# EAGLE board TelemetryModule (EAGLE 9.5.2)
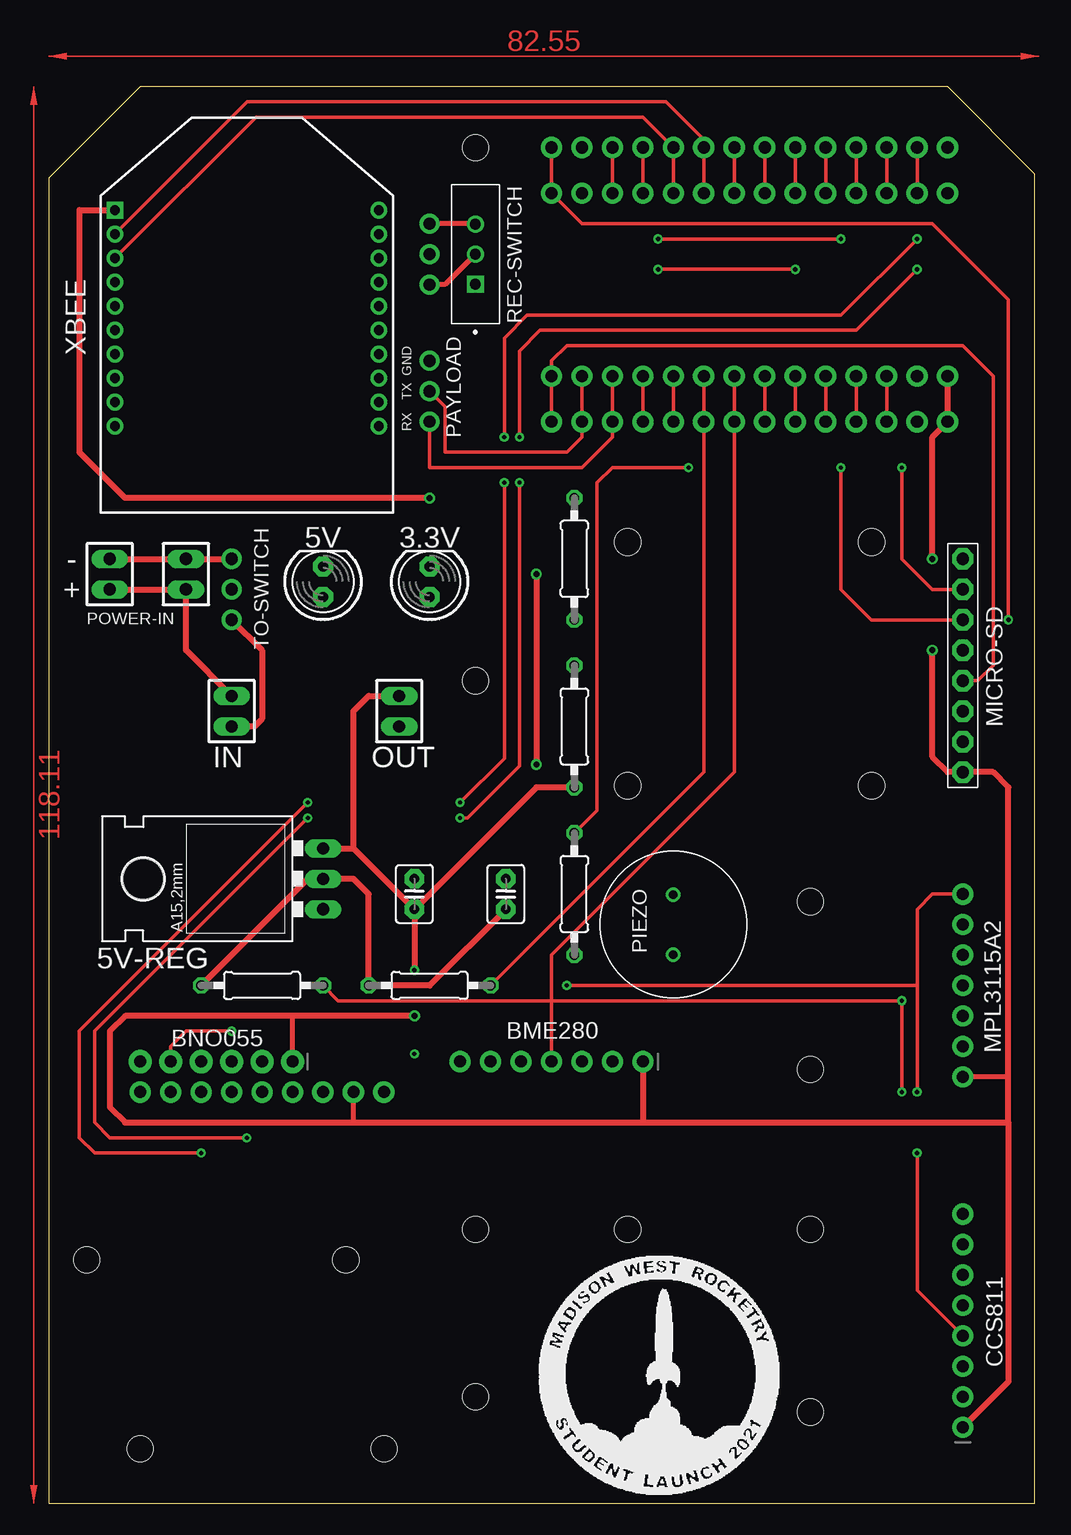
[diagram p0: board, top side]
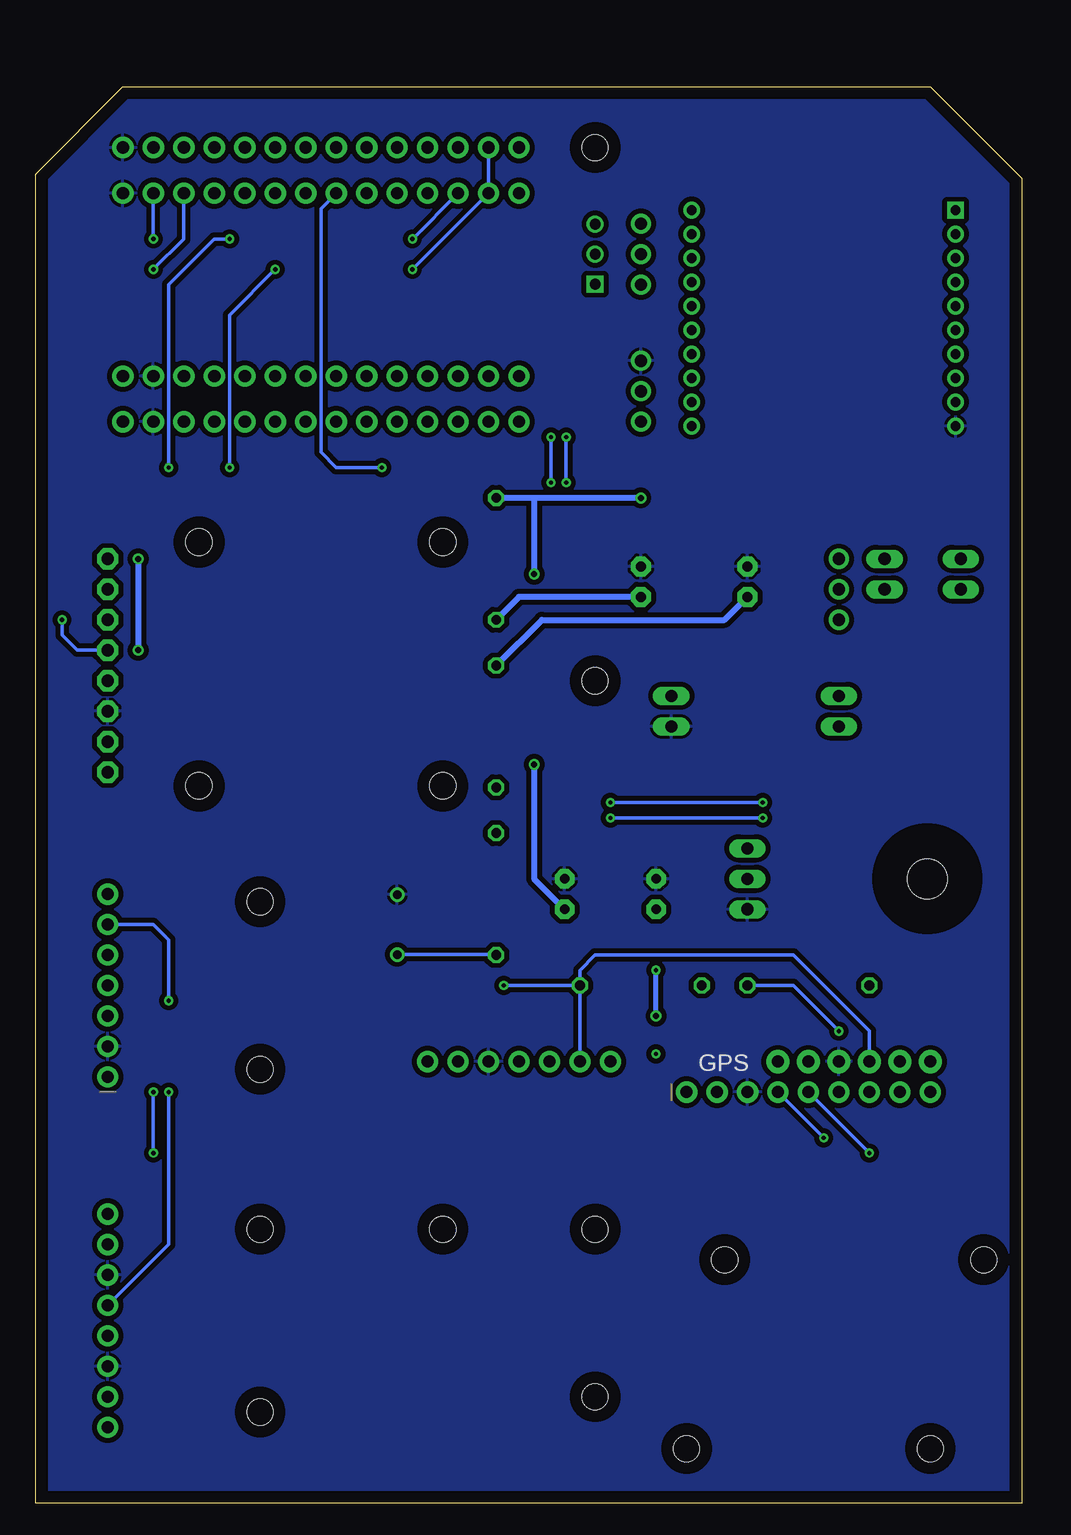
[diagram p1: board, bottom side, seen from below]

Size 82.22 x 118.1 mm. Coordinates in mm from the lower left corner, seen from the top.
Outline: 0,0 82.22,0 82.22,110.82 74.94,118.1 7.61,118.1 0,110.49 0,0
Copper layers (1*16): Top 0.035mm / dielectric 1.5mm / Bottom 0.035mm
Design rules "default": minimum track width 6mil, minimum drill 0.35mm, track to track 6mil, track to pad 6mil, pad to pad 6mil, via to via 6mil, smd to smd 6mil, copper to edge 40mil, drill to drill 6mil, minimum pad ring 10mil, minimum via ring 8mil, stop-mask expansion 4mil, vias tented up to drill 0mil, thermal gap 10mil
Holes 2.2 mm at 68.58,59.82 68.58,80.14 48.26,80.14 48.26,59.82
Holes 2.16 mm at 35.56,22.86 48.26,22.86 63.5,50.16 63.5,36.2 3.17,20.32 24.77,20.32 7.62,4.57 27.94,4.57 63.5,22.86 63.5,7.62 35.56,68.58 35.56,113.03 35.56,8.89

## Footprints (pad centres in the part's own frame; a part is rotated, then mirrored left to right if it is on the bottom)
LED5MM = drill 0.813 pad 1.676 octagon: A -1.27,0; K 1.27,0
LD1117V33 = drill 1.016 long: GND -2.54,-8.89; IN 2.54,-8.89; OUT 0,-8.89 | hole 3.302: 0,6.096
SIP-100-02-40Y = drill 1.016 long: 1 -1.27,0; 2 1.27,0
1X07_ROUND_70 = drill 1 pad 1.778: 1 -7.62,0; 2 -5.08,0; 3 -2.54,0; 4 0,0; 5 2.54,0; 6 5.08,0; 7 7.62,0
1X06_ROUND_76 = drill 1 pad 1.93: 1 -6.35,0; 2 -3.81,0; 3 -1.27,0; 4 1.27,0; 5 3.81,0; 6 6.35,0
C2.5-3 = drill 0.813 pad 1.6 octagon: 1 -1.27,0; 2 1.27,0
1X08_ROUND_70 = drill 1 pad 1.778: 1 -8.89,0; 2 -6.35,0; 3 -3.81,0; 4 -1.27,0; 5 1.27,0; 6 3.81,0; 7 6.35,0; 8 8.89,0
1X09_ROUND_70 = drill 1 pad 1.778: 1 -10.16,0; 2 -7.62,0; 3 -5.08,0; 4 -2.54,0; 5 0,0; 6 2.54,0; 7 5.08,0; 8 7.62,0; 9 10.16,0
1X08-BIG = drill 1.016 pad 1.778 octagon: 1 -8.89,0; 2 -6.35,0; 3 -3.81,0; 4 -1.27,0; 5 1.27,0; 6 3.81,0; 7 6.35,0; 8 8.89,0
1X03-CLEANBIG = drill 1.016 pad 1.676: 1 -2.54,0; 2 0,0; 3 2.54,0
0207/10 = drill 0.813 octagon: 1 -5.08,0; 2 5.08,0
SW_MINI-SPDT-SW = drill 0.9 square: 1 -2.5,0 | drill 0.9: 2 0,0; 3 2.5,0
1X14-CB = drill 1.016 pad 1.778: 1 -16.51,0; 2 -13.97,0; 3 -11.43,0; 4 -8.89,0; 5 -6.35,0; 6 -3.81,0; 7 -1.27,0; 8 1.27,0; 9 3.81,0; 10 6.35,0; 11 8.89,0; 12 11.43,0; 13 13.97,0; 14 16.51,0
PS1240P02BT = drill 0.7: P$1 -2.5,0; P$2 2.5,0
DIP2200W51P200L3294H279Q20P = drill 0.8 pad 1.4 square: 1 -11,8.75 | drill 0.8 pad 1.4: 2 -11,6.75; 3 -11,4.75; 4 -11,2.75; 5 -11,0.75; 6 -11,-1.25; 7 -11,-3.25; 8 -11,-5.25; 9 -11,-7.25; 10 -11,-9.25; 11 11,-9.25; 12 11,-7.25; 13 11,-5.25; 14 11,-3.25; 15 11,-1.25; 16 11,0.75; 17 11,2.75; 18 11,4.75; 19 11,6.75; 20 11,8.75

## Placement (x,y rotation side)
3.3V  [LED5MM]  31.75,76.83 90 top
5V  [LED5MM]  22.86,76.83 90 top
5V-REG  LD1117V33  [LD1117V33]  13.97,52.07 90 top
AUX-POWER-IN  M-1X02-SIP-100-40Y  [SIP-100-02-40Y]  11.43,77.47 90 top
BME280  [1X07_ROUND_70]  41.91,36.83 180 top
BNO055  [1X06_ROUND_76]  13.97,36.83 180 top
C1  10µF  [C2.5-3]  30.48,50.8 90 top
C2  10µF  [C2.5-3]  38.1,50.8 90 top
CCS811  [1X08_ROUND_70]  76.2,15.24 90 top
GPS  [1X09_ROUND_70]  17.78,34.29 0 bottom
IN  M-1X02-SIP-100-40Y  [SIP-100-02-40Y]  15.24,66.04 90 top
MICRO-SD  [1X08-BIG]  76.2,69.85 90 top
MPL3115A2  [1X07_ROUND_70]  76.2,43.18 90 bottom
OUT  M-1X02-SIP-100-40Y  [SIP-100-02-40Y]  29.21,66.04 270 top
PAYLOAD  [1X03-CLEANBIG]  31.75,92.71 90 top
POWER-IN  M-1X02-SIP-100-40Y  [SIP-100-02-40Y]  5.08,77.47 90 top
R1  10KΩ  [0207/10]  17.78,43.18 180 top
R2  10KΩ  [0207/10]  31.75,43.18 180 top
R3  220Ω  [0207/10]  43.81,50.8 270 top
R4  500Ω  [0207/10]  43.81,64.77 270 top
R5  330Ω  [0207/10]  43.81,78.74 90 top
REC-SWITCH  [1X03-CLEANBIG]  31.75,104.14 90 top
S2  MINI-SPDT-SW  [SW_MINI-SPDT-SW]  35.56,104.14 90 top
TEENSY-LEFT  [1X14-CB]  58.42,113.03 180 top
TEENSY-LEFT-DUPE  [1X14-CB]  58.42,109.22 180 top
TEENSY-RIGHT  [1X14-CB]  58.42,90.17 180 top
TEENSY-RIGHT-DUPE  [1X14-CB]  58.42,93.98 180 top
TO-SWITCH  [1X03-CLEANBIG]  15.24,76.2 270 top
U$3  PS1240P02BT  [PS1240P02BT]  52.07,48.26 90 top
XBEE  XBP9B-XCST-002  [DIP2200W51P200L3294H279Q20P]  16.51,99.06 0 top

## Library data of the parts
3.3V 5V MICRO-SD PAYLOAD REC-SWITCH TEENSY-LEFT TEENSY-LEFT-DUPE TEENSY-RIGHT TEENSY-RIGHT-DUPE TO-SWITCH = adafruit
5V-REG = LD1117V33
AUX-POWER-IN IN OUT POWER-IN = con-headers-jp
BME280 BNO055 CCS811 GPS MPL3115A2 = microbuilder
C1 C2 = capacitor-wima
R1-R5 = rcl; SPICEPREFIX: R
S2 = MINI-SPDT-SW; AVAILABILITY: Unavailable; DESCRIPTION: Slide Switches MINI SPDT SWITCH; MF: Gravitech; MP: MINI-SPDT-SW; PACKAGE: None; PRICE: None
U$3 = PS1240P02BT; AVAILABILITY: Unavailable; DESCRIPTION: Buzzers Transducer, Externally Driven Piezo 3V 4kHz 60dB @ 3V, 10cm Through Hole PC Pins; MF: TDK; MP: PS1240P02BT; PACKAGE: 2020 TDK; PRICE: None
XBEE = XBP9B-XCST-002; DESCRIPTION: 802.15.4 LR-WPAN 900MHz 19.2Kbps; DIGI-KEY_PART_NUMBER: 602-1294-ND; DIGI-KEY_PURCHASE_URL: https://www.digikey.com/product-detail/en/digi-international/XBP9B-XCST-002/602-1294-ND/3482818?utm_source=snapeda&utm_medium=aggregator&utm_campaign=symbol; MF: Digi International; MP: XBP9B-XCST-002; PACKAGE: Module Digi International

## Nets
+3V3: 5V-REG.OUT C2.1 R1.2 R2.2 R5.2 XBEE.1
+5V: 5V-REG.IN BME280.1 BNO055.1 C1.1 CCS811.1 GPS.2 MICRO-SD.1 MPL3115A2.1 OUT.1 R4.2 TEENSY-RIGHT-DUPE.1 TEENSY-RIGHT.1
BUZZER: R3.1 TEENSY-LEFT-DUPE.8 TEENSY-LEFT.8
CLK: MICRO-SD.4 TEENSY-RIGHT-DUPE.14 TEENSY-RIGHT.14
CS: MICRO-SD.7 TEENSY-LEFT-DUPE.12 TEENSY-LEFT.12
DI: MICRO-SD.6 TEENSY-LEFT-DUPE.13 TEENSY-LEFT.13
DO: MICRO-SD.5 TEENSY-LEFT-DUPE.14 TEENSY-LEFT.14
GND: 3.3V.K 5V-REG.GND 5V.K BME280.3 BNO055.3 C1.2 C2.2 CCS811.3 CCS811.6 GPS.3 MICRO-SD.3 MPL3115A2.2 OUT.2 PAYLOAD.3 TEENSY-LEFT-DUPE.1 TEENSY-LEFT.1 TEENSY-RIGHT-DUPE.2 TEENSY-RIGHT.2 U$3.P$2 XBEE.10
N$1: AUX-POWER-IN.1 IN.2 POWER-IN.1
N$2: AUX-POWER-IN.2 POWER-IN.2 TO-SWITCH.1
N$3: REC-SWITCH.1 S2.2
N$4: REC-SWITCH.3 S2.3
N$5: IN.1 TO-SWITCH.3
N$6: R3.2 U$3.P$1
N$7: TEENSY-LEFT-DUPE.4 TEENSY-LEFT.4
N$8: TEENSY-LEFT-DUPE.5 TEENSY-LEFT.5
N$9: TEENSY-LEFT-DUPE.6 TEENSY-LEFT.6
N$10: TEENSY-LEFT-DUPE.7 TEENSY-LEFT.7
N$11: TEENSY-LEFT-DUPE.11 TEENSY-LEFT.11
N$12: TEENSY-RIGHT-DUPE.7 TEENSY-RIGHT.7
N$13: TEENSY-RIGHT-DUPE.6 TEENSY-RIGHT.6
N$14: TEENSY-RIGHT-DUPE.5 TEENSY-RIGHT.5
N$15: TEENSY-RIGHT-DUPE.4 TEENSY-RIGHT.4
N$16: TEENSY-RIGHT-DUPE.3 TEENSY-RIGHT.3
N$17: 5V.A R4.1
N$18: TEENSY-RIGHT-DUPE.10 TEENSY-RIGHT.10
N$19: TEENSY-RIGHT-DUPE.11 TEENSY-RIGHT.11
N$20: 3.3V.A R5.1
RX: GPS.5 TEENSY-LEFT-DUPE.2 TEENSY-LEFT.2
RX2: TEENSY-LEFT-DUPE.9 TEENSY-LEFT.9 XBEE.2
RX3: PAYLOAD.1 TEENSY-RIGHT-DUPE.12 TEENSY-RIGHT.12
SCL: BME280.4 BNO055.5 CCS811.5 MPL3115A2.6 R1.1 TEENSY-RIGHT-DUPE.8 TEENSY-RIGHT.8
SDA: BME280.6 BNO055.4 CCS811.4 MPL3115A2.7 R2.1 TEENSY-RIGHT-DUPE.9 TEENSY-RIGHT.9
TX: GPS.4 TEENSY-LEFT-DUPE.3 TEENSY-LEFT.3
TX2: TEENSY-LEFT-DUPE.10 TEENSY-LEFT.10 XBEE.3
TX3: PAYLOAD.2 TEENSY-RIGHT-DUPE.13 TEENSY-RIGHT.13

## Tracks (layer width: path | path; a pad name or v marks a point on that pad's centre or on a via)
+3V3  (via drill 0.5)
  Top 0.508: R1.2 21.59,52.07 5V-REG.OUT 25.4,52.07 26.67,50.8 R2.2 31.75,43.18 C2.1 | v31.75,83.82 6.35,83.82 2.54,87.63 2.54,107.81 XBEE.1 | v40.64,77.47 v40.64,61.59
  Bottom 0.508: v31.75,83.82 40.64,83.82 | 40.64,83.82 R5.2 | 40.64,83.82 v40.64,77.47 | v40.64,61.59 40.64,52.07 C2.1
+5V  (via drill 0.35, 0.5)
  Top 0.406: 6.35,31.75 25.4,31.75 | 49.53,31.75 25.4,31.75 | v30.48,40.64 20.32,40.64 | BNO055.1 20.32,40.64 | 25.4,31.75 GPS.2 | 6.35,40.64 20.32,40.64 | 78.74,60.96 MICRO-SD.1 74.93,60.96 | 80.01,35.56 80.01,59.69 | 80.01,35.56 80.01,31.75 | 80.01,35.56 MPL3115A2.1
  Top 0.508: 80.01,31.75 80.01,10.16 CCS811.1 | C1.1 v30.48,44.45 | v30.48,40.64 6.35,40.64 5.08,39.37 5.08,33.02 6.35,31.75 49.53,31.75 | BME280.1 49.53,31.75 | 49.53,31.75 80.01,31.75 | 80.01,31.75 80.01,59.69 78.74,60.96 74.93,60.96 73.66,62.23 v73.66,71.12 | v73.66,78.74 73.66,88.9 TEENSY-RIGHT.1 TEENSY-RIGHT-DUPE.1 | R4.2 40.64,59.69 C1.1 | 25.4,54.61 C1.1 | 5V-REG.IN 25.4,54.61 | OUT.1 26.67,67.31 25.4,66.04 25.4,54.61
  Bottom 0.406: v30.48,40.64 v30.48,44.45
  Bottom 0.508: v73.66,78.74 v73.66,71.12
BUZZER  (via drill 0.35)
  Top 0.305: TEENSY-LEFT.8 TEENSY-LEFT-DUPE.8 | v53.34,86.36 46.99,86.36 45.72,85.09 45.72,57.78 R3.1
  Bottom 0.305: TEENSY-LEFT-DUPE.8 58.42,107.95 58.42,87.63 57.15,86.36 v53.34,86.36
CLK
  Top 0.305: TEENSY-RIGHT.14 TEENSY-RIGHT-DUPE.14 41.91,95.25 43.18,96.52 76.2,96.52 78.74,93.98 78.74,69.85 77.47,68.58 MICRO-SD.4
CS  (via drill 0.35)
  Top 0.305: TEENSY-LEFT-DUPE.12 TEENSY-LEFT.12 | v66.04,105.41 v50.8,105.41 | MICRO-SD.7 73.66,76.2 71.12,78.74 v71.12,86.36
  Bottom 0.305: v71.12,86.36 71.12,101.6 67.31,105.41 v66.04,105.41 | v50.8,105.41 TEENSY-LEFT-DUPE.12
DI  (via drill 0.35)
  Top 0.305: v62.23,102.87 v50.8,102.87 | MICRO-SD.6 68.58,73.66 66.04,76.2 v66.04,86.36
  Bottom 0.305: v62.23,102.87 66.04,99.06 v66.04,86.36 | v50.8,102.87 TEENSY-LEFT-DUPE.13 TEENSY-LEFT.13
DO  (via drill 0.35)
  Top 0.305: v80.01,73.66 80.01,100.33 73.66,106.68 44.45,106.68 TEENSY-LEFT-DUPE.14 TEENSY-LEFT.14
  Bottom 0.305: MICRO-SD.5 78.74,71.12 80.01,72.39 v80.01,73.66
GND
  pour Bottom (isolate 0.406): 0,0 0,110.49 7.62,118.11 74.93,118.11 82.55,110.49 82.55,0
N$1
  Top 0.508: POWER-IN.1 AUX-POWER-IN.1 11.43,71.12 IN.2
N$2
  Top 0.508: POWER-IN.2 AUX-POWER-IN.2 TO-SWITCH.1
N$3
  Top 0.406: S2.2 33.02,101.6 REC-SWITCH.1
N$4
  Top 0.406: S2.3 35.52,106.68 REC-SWITCH.3
N$5
  Top 0.508: TO-SWITCH.3 17.78,71.12 17.78,65.41 17.14,64.77 IN.1
N$6
  Bottom 0.305: U$3.P$1 43.81,45.76 R3.2
N$7
  Top 0.305: TEENSY-LEFT.4 TEENSY-LEFT-DUPE.4
N$8
  Top 0.305: TEENSY-LEFT.5 TEENSY-LEFT-DUPE.5
N$9
  Top 0.305: TEENSY-LEFT-DUPE.6 TEENSY-LEFT.6
N$10
  Top 0.305: TEENSY-LEFT.7 TEENSY-LEFT-DUPE.7
N$11
  Top 0.305: TEENSY-LEFT.11 TEENSY-LEFT-DUPE.11
N$12
  Top 0.305: TEENSY-RIGHT-DUPE.7 TEENSY-RIGHT.7
N$13
  Top 0.305: TEENSY-RIGHT-DUPE.6 TEENSY-RIGHT.6
N$14
  Top 0.305: TEENSY-RIGHT-DUPE.5 TEENSY-RIGHT.5
N$15
  Top 0.305: TEENSY-RIGHT-DUPE.4 TEENSY-RIGHT.4
N$16
  Top 0.305: TEENSY-RIGHT-DUPE.3 TEENSY-RIGHT.3
N$17
  Bottom 0.508: R4.1 40.01,73.66 24.77,73.66 5V.A
N$18
  Top 0.305: TEENSY-RIGHT-DUPE.10 TEENSY-RIGHT.10
N$19
  Top 0.305: TEENSY-RIGHT.11 TEENSY-RIGHT-DUPE.11
N$20
  Bottom 0.508: 3.3V.A 41.91,75.56 R5.1
N$21  (via drill 0.35)
  other vias: 30.48,37.46
RX  (via drill 0.35)
  Top 0.305: v37.97,88.9 37.97,97.16 39.88,99.06 66.04,99.06 v72.39,105.41 | v21.59,58.42 2.54,39.37 2.54,30.48 3.81,29.21 v12.7,29.21 | v34.29,58.42 37.97,62.1 v37.97,85.09 | TEENSY-LEFT.2 TEENSY-LEFT-DUPE.2
  Bottom 0.305: v21.59,58.42 v34.29,58.42 | v72.39,105.41 TEENSY-LEFT-DUPE.2 | GPS.5 v12.7,29.21 | v37.97,88.9 v37.97,85.09
RX2
  Top 0.305: TEENSY-LEFT-DUPE.9 TEENSY-LEFT.9 54.61,113.66 51.44,116.84 16.54,116.84 XBEE.2
RX3
  Top 0.305: PAYLOAD.1 31.75,86.36 44.45,86.36 46.99,88.9 TEENSY-RIGHT.12 TEENSY-RIGHT-DUPE.12
SCL  (via drill 0.35)
  Top 0.305: TEENSY-RIGHT-DUPE.8 TEENSY-RIGHT.8 57.15,60.96 41.91,45.72 41.91,41.91 | R1.1 24.13,41.91 41.91,41.91 | BNO055.5 10.16,38.1 11.43,39.37 v15.24,39.37 | 41.91,41.91 BME280.4 | 41.91,41.91 v71.12,41.91 v71.12,34.29
  Bottom 0.305: v15.24,39.37 19.05,43.18 R1.1 | v71.12,41.91 71.12,46.99 72.39,48.26 MPL3115A2.6 | CCS811.5 71.12,21.59 v71.12,34.29
SDA  (via drill 0.35)
  Top 0.305: TEENSY-RIGHT-DUPE.9 TEENSY-RIGHT.9 54.61,60.96 R2.1 | MPL3115A2.7 73.66,50.8 72.39,49.53 72.39,43.18 | 72.39,43.18 v43.18,43.18 | 72.39,43.18 v72.39,34.29 | v72.39,29.21 72.39,17.78 CCS811.4
  Bottom 0.305: R2.1 v43.18,43.18 | R2.1 36.83,44.45 35.56,45.72 19.05,45.72 12.7,39.37 BNO055.4 | R2.1 BME280.6 | v72.39,34.29 v72.39,29.21
TX  (via drill 0.35)
  Top 0.305: v39.24,88.9 39.24,96.07 40.97,97.79 67.31,97.79 v72.39,102.87 | v16.51,30.48 5.08,30.48 3.81,31.75 3.81,39.37 v21.59,57.15 | v39.24,85.09 39.24,61.47 34.92,57.15 v34.29,57.15 | TEENSY-LEFT-DUPE.3 TEENSY-LEFT.3
  Bottom 0.305: v39.24,88.9 v39.24,85.09 | v34.29,57.15 v21.59,57.15 | v72.39,102.87 69.85,105.41 TEENSY-LEFT-DUPE.3 | GPS.4 v16.51,30.48
TX2
  Top 0.305: XBEE.3 17.27,115.57 49.53,115.57 TEENSY-LEFT.10 TEENSY-LEFT-DUPE.10
TX3
  Top 0.305: TEENSY-RIGHT-DUPE.13 TEENSY-RIGHT.13 44.45,88.9 43.18,87.63 33.02,87.63 33.02,91.44 PAYLOAD.2
(copper drawn outside any net)
  shapes: Top area x2

## Text on the board
tNames: GND | TX | RX | - | +